# Altium PCB Remote.PcbDoc
Units mm, origin at the board's own origin, x right, y up, seen from the top; angles counter-clockwise.
Board outline 26.42 x 30.1 mm, 6 copper layers (Top Layer, Layer 3, Layer 1, Layer 2, Layer 4, Bottom Layer), stack 0.816 mm thick; 38 components, 23 nets, 120 pads, 28 vias.
Unrouted connection lines stored in the file: 17.
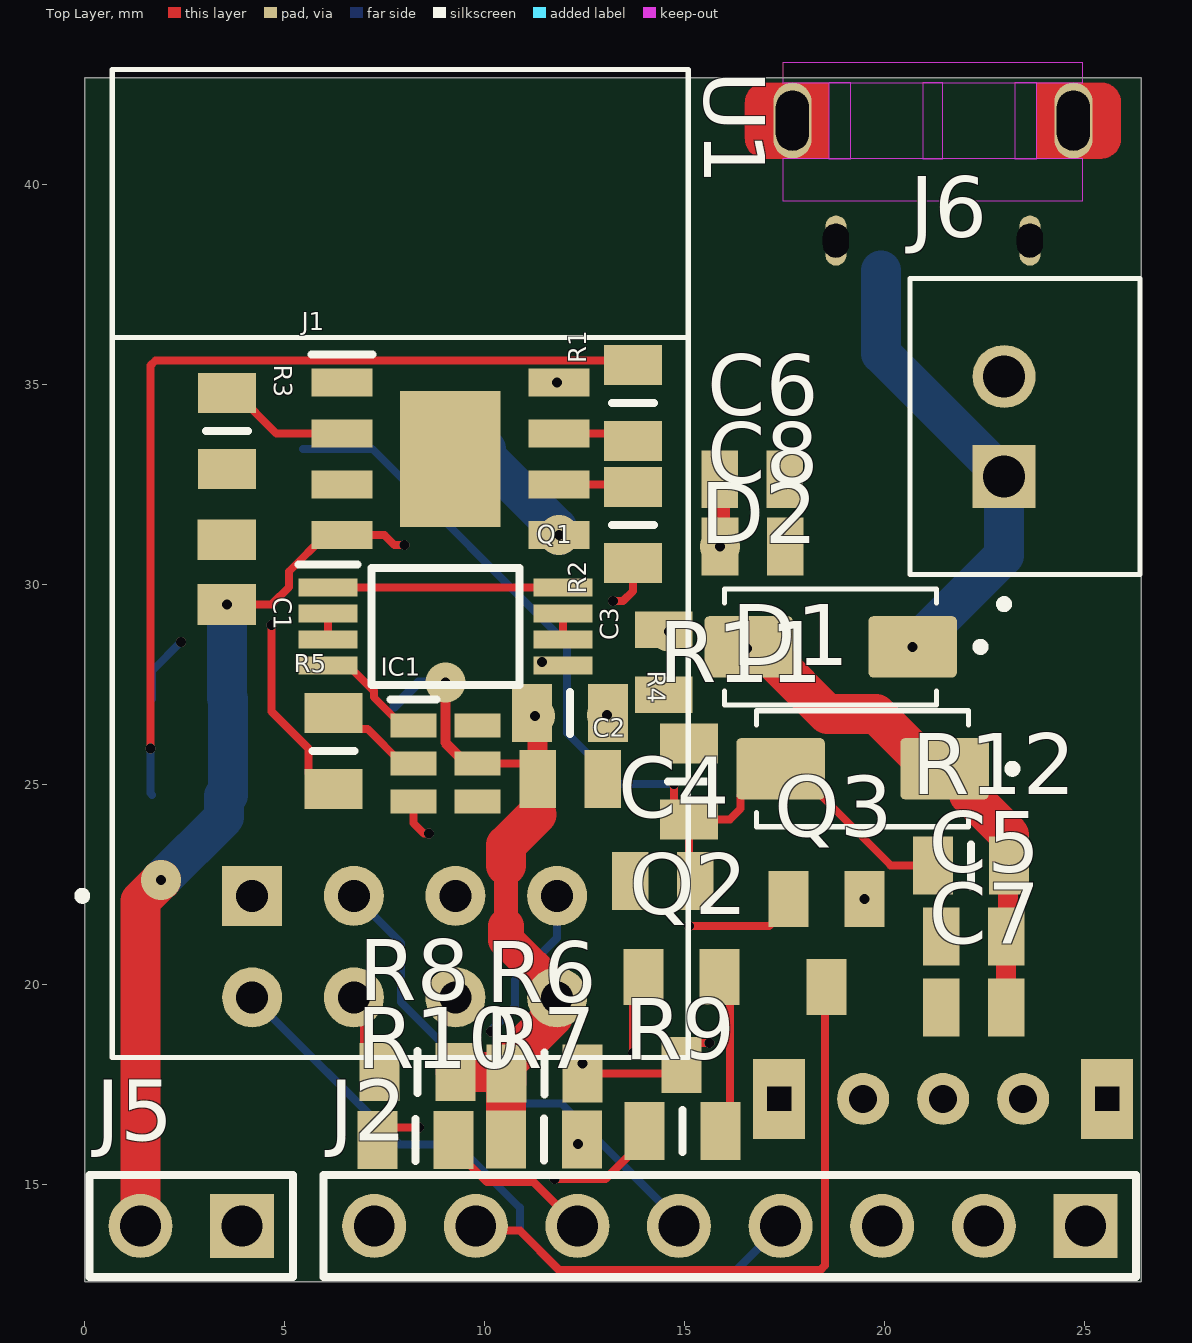
[diagram p0: Top Layer view]
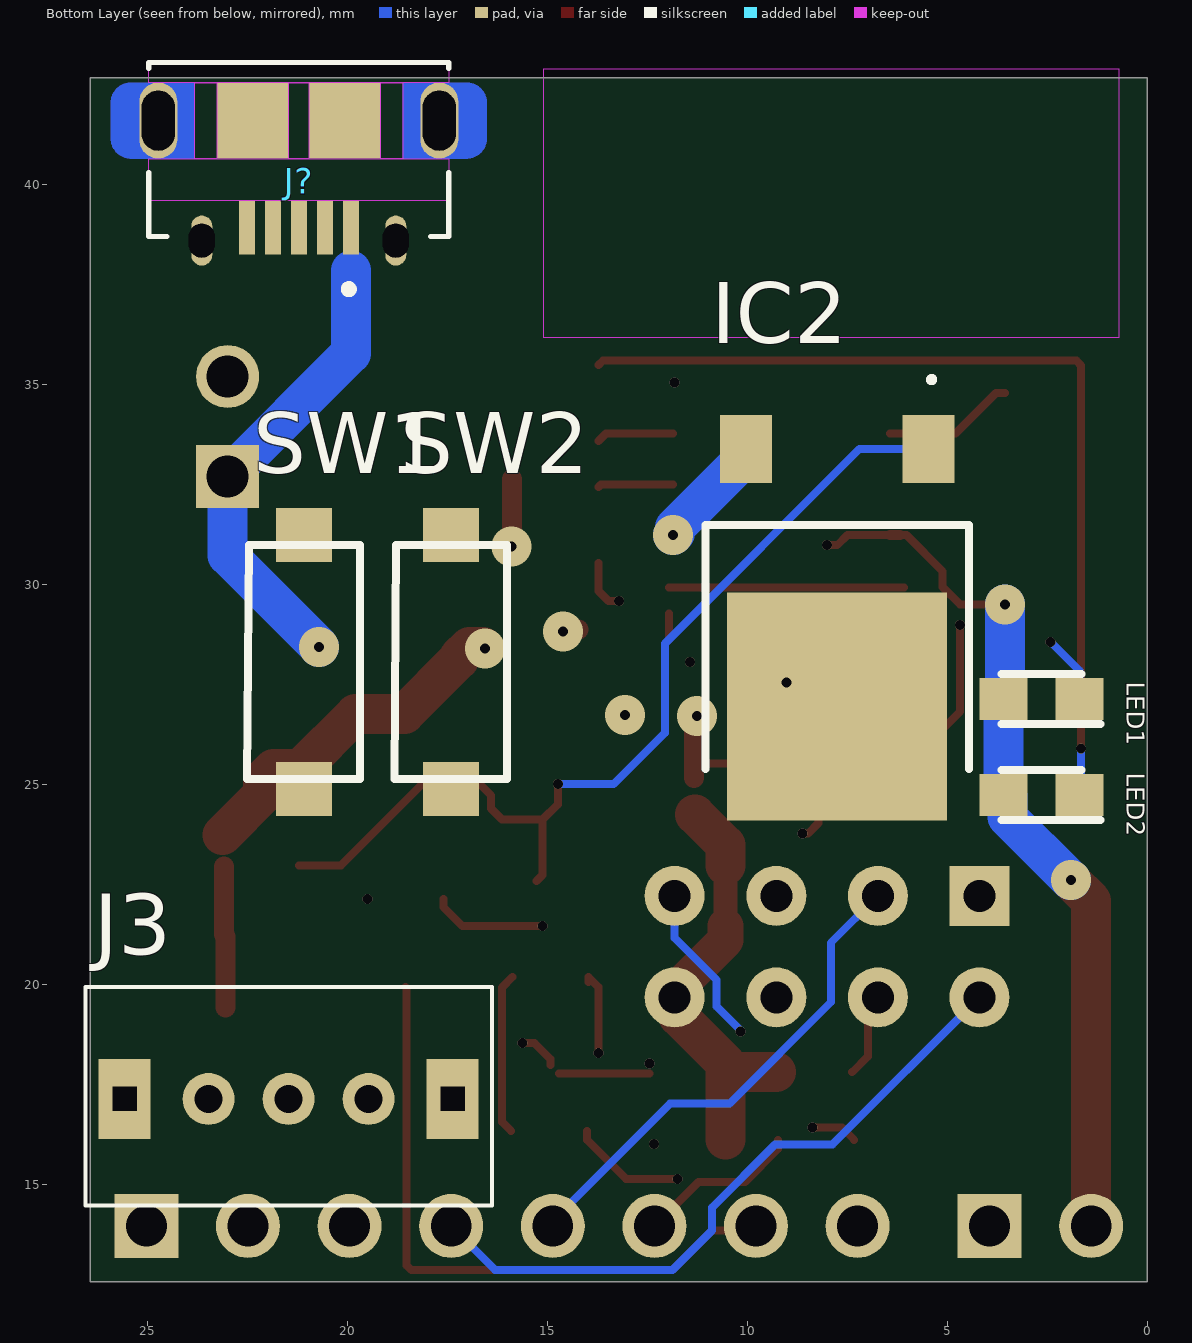
[diagram p1: Bottom Layer view, seen from below]
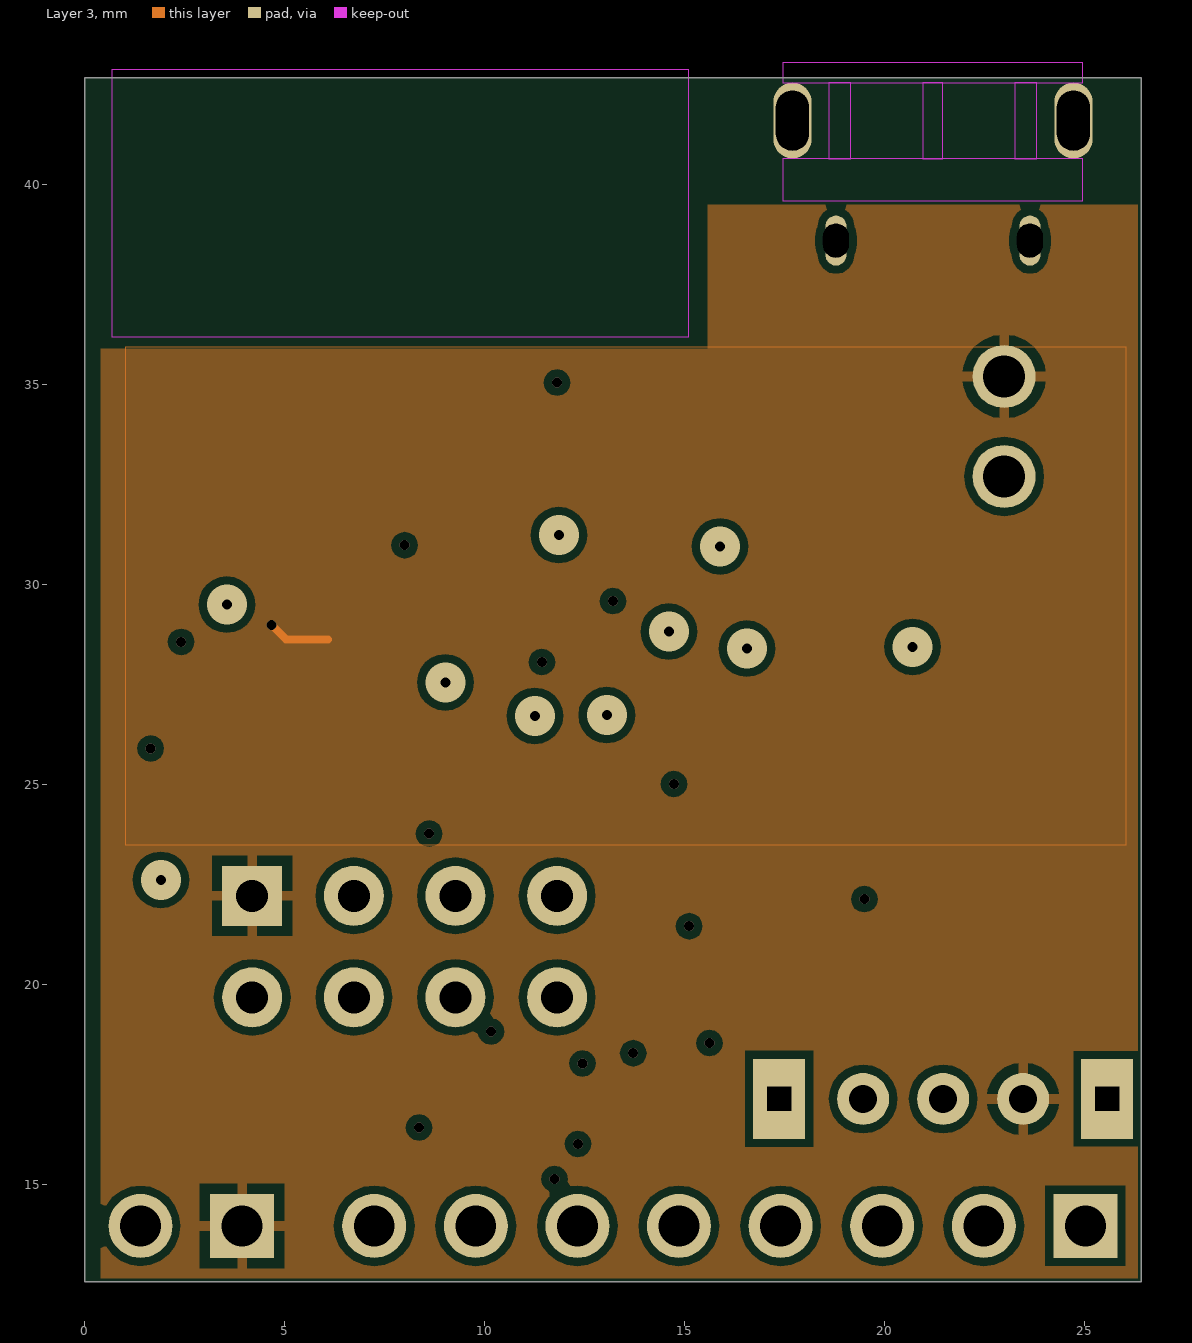
[diagram p2: Layer 3]
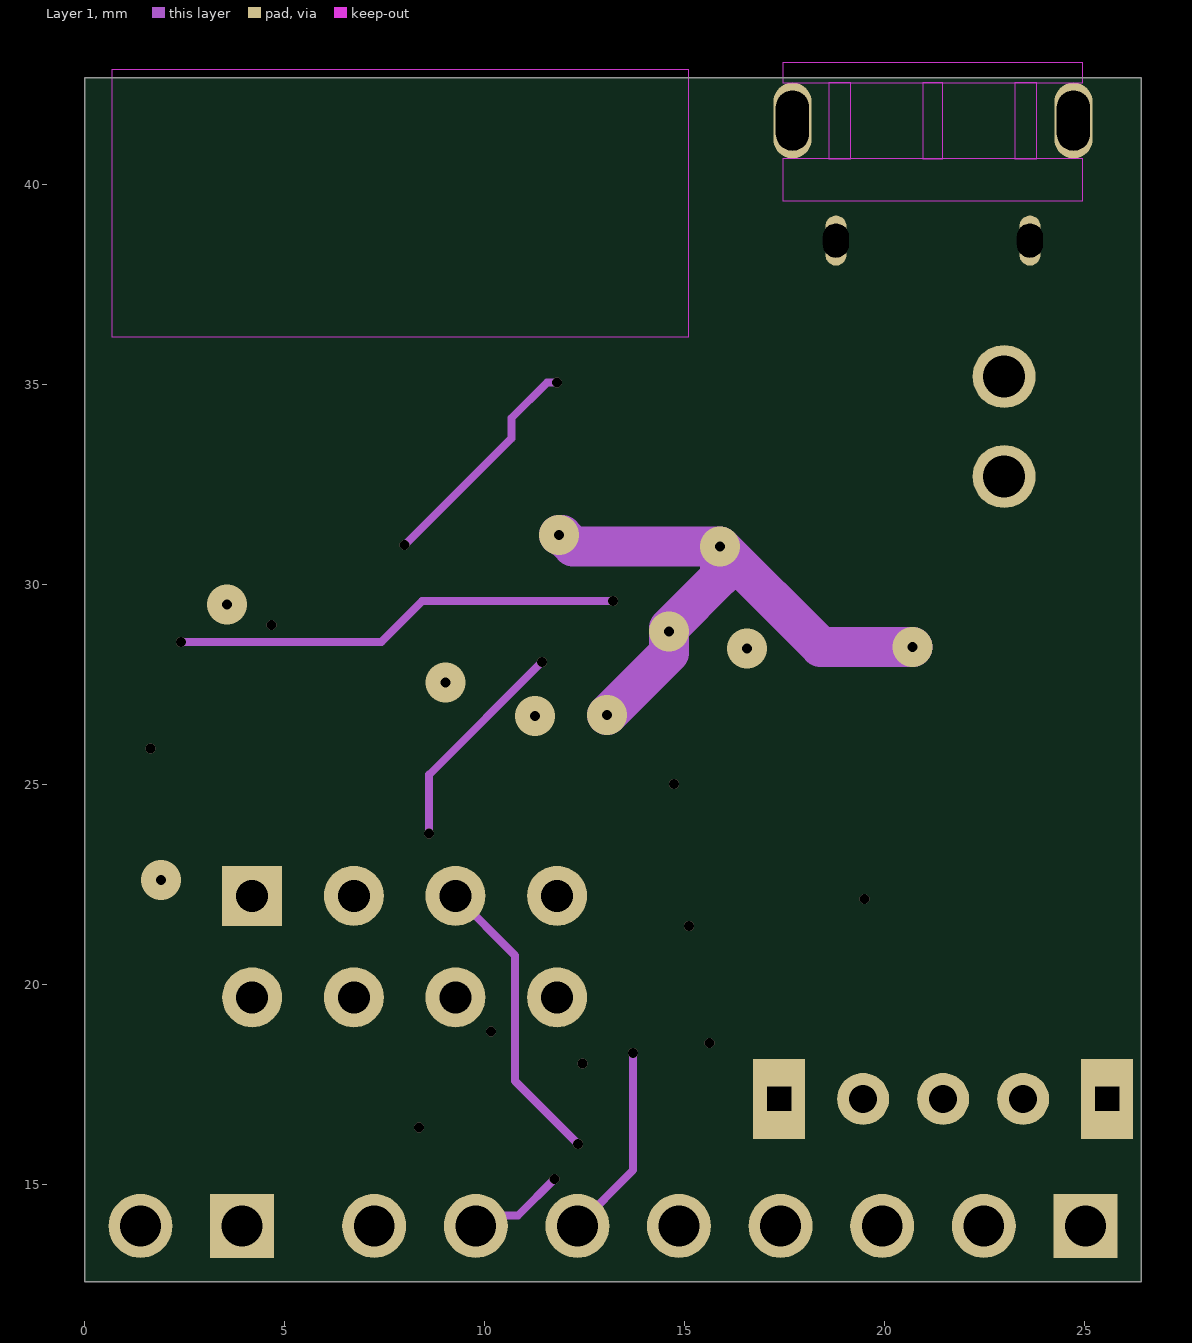
[diagram p3: Layer 1]
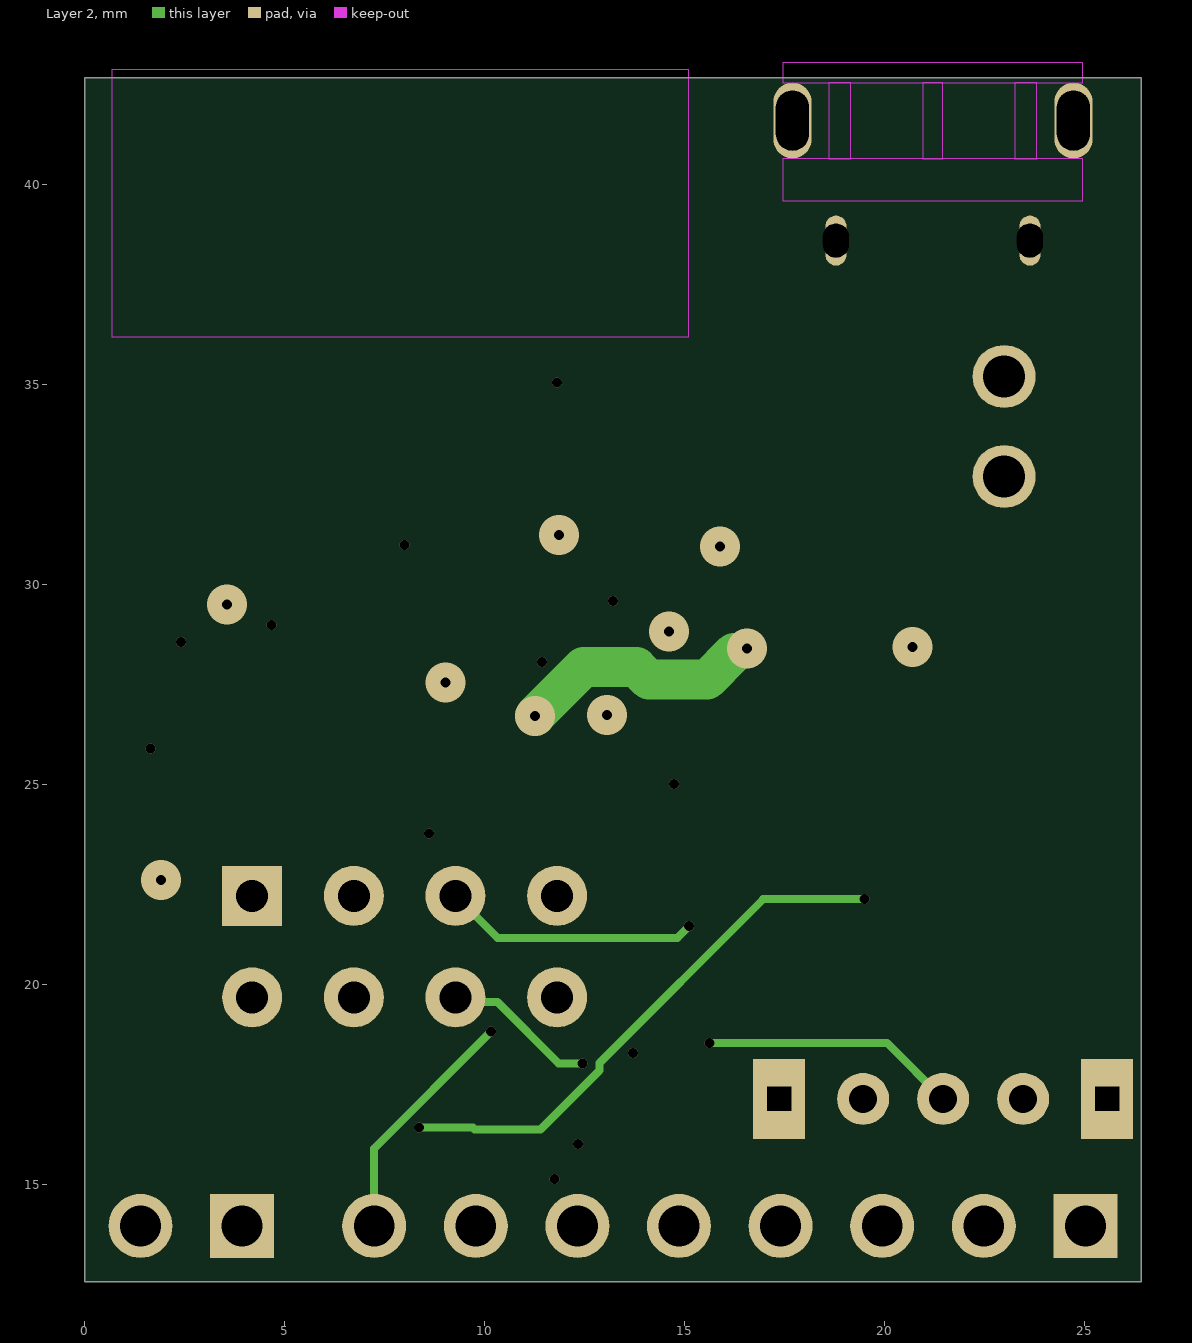
[diagram p4: Layer 2]
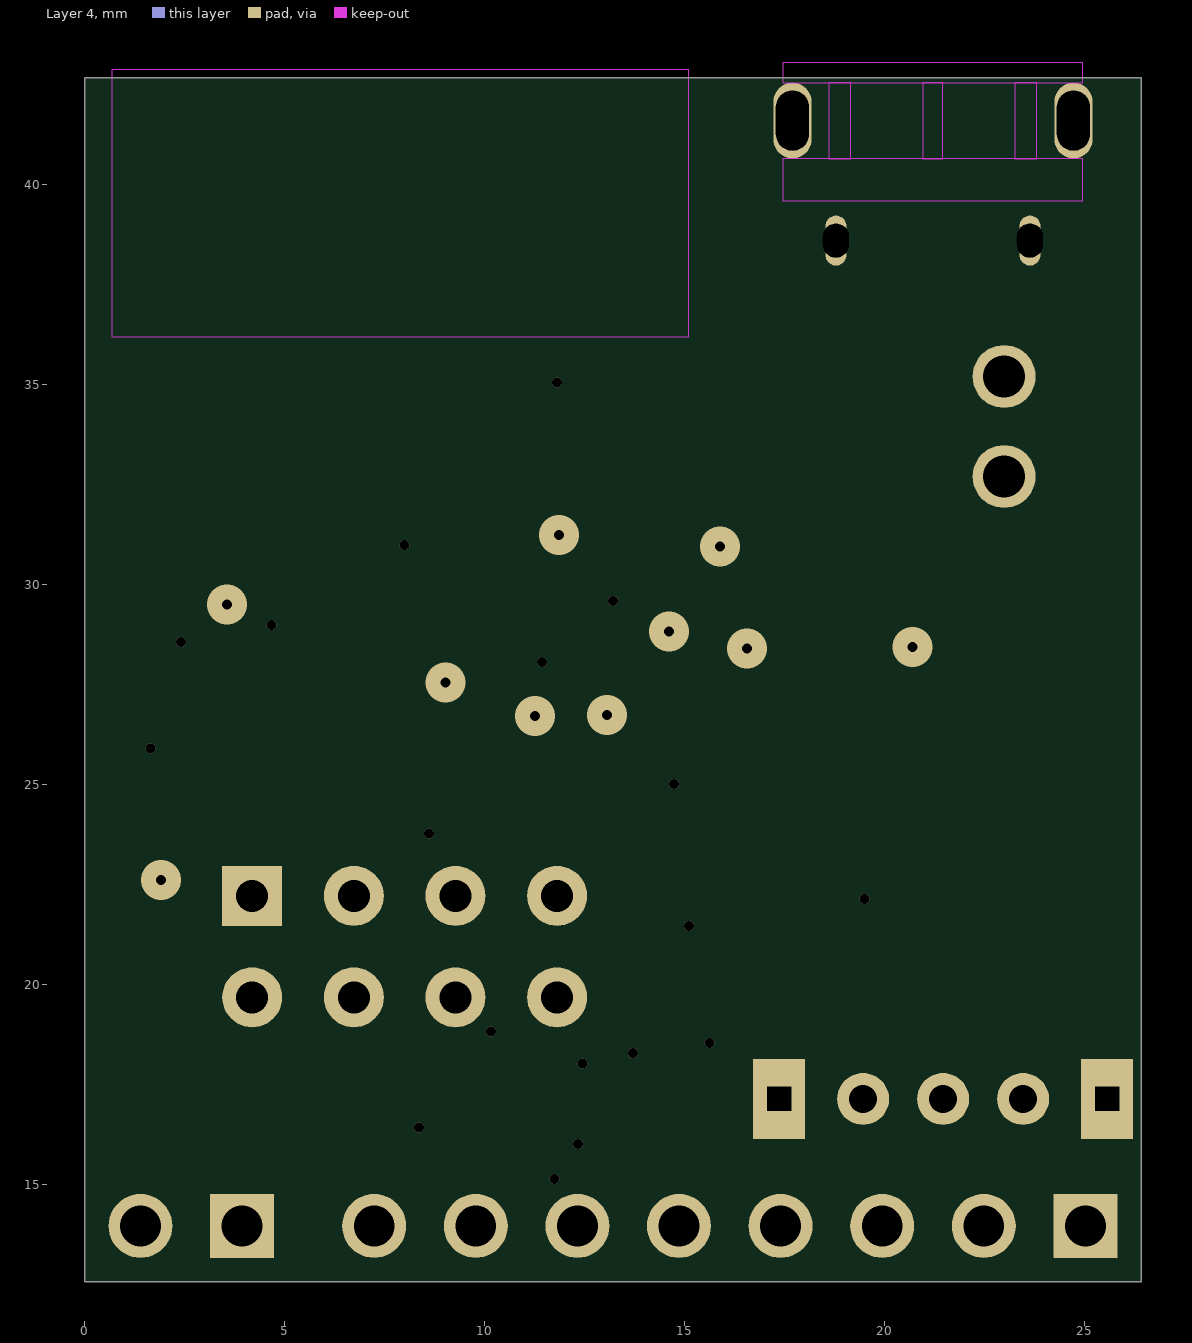
[diagram p5: Layer 4]
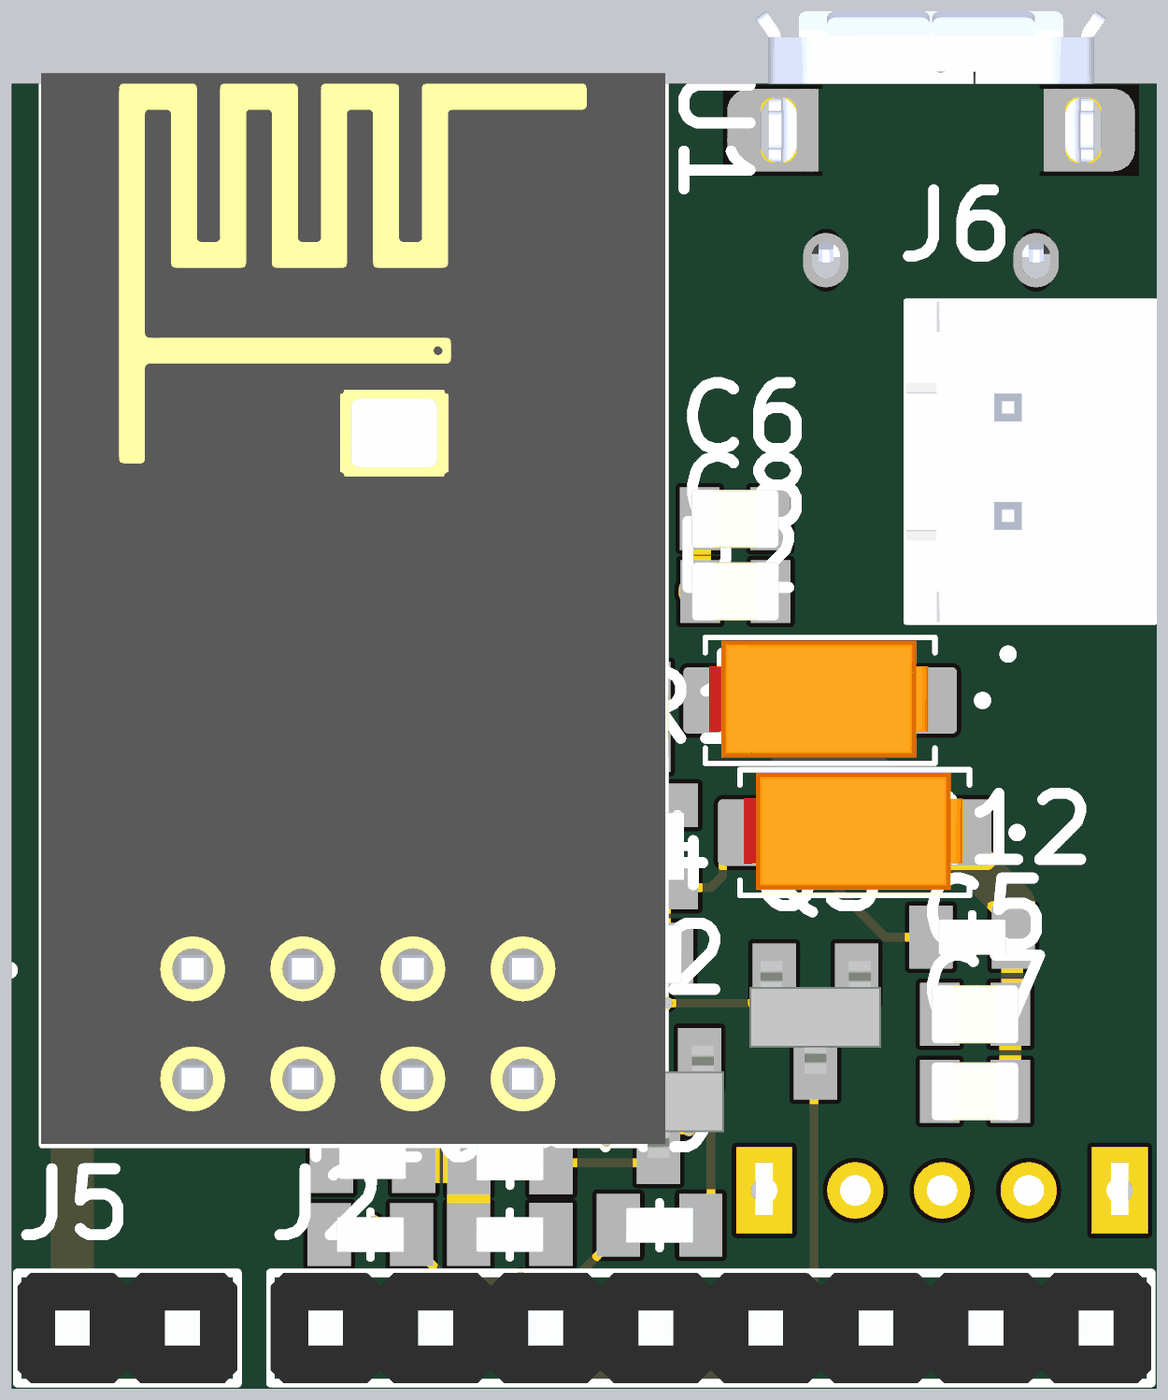
[diagram p6: 3D render of the assembled board from above, using the file's embedded part models]
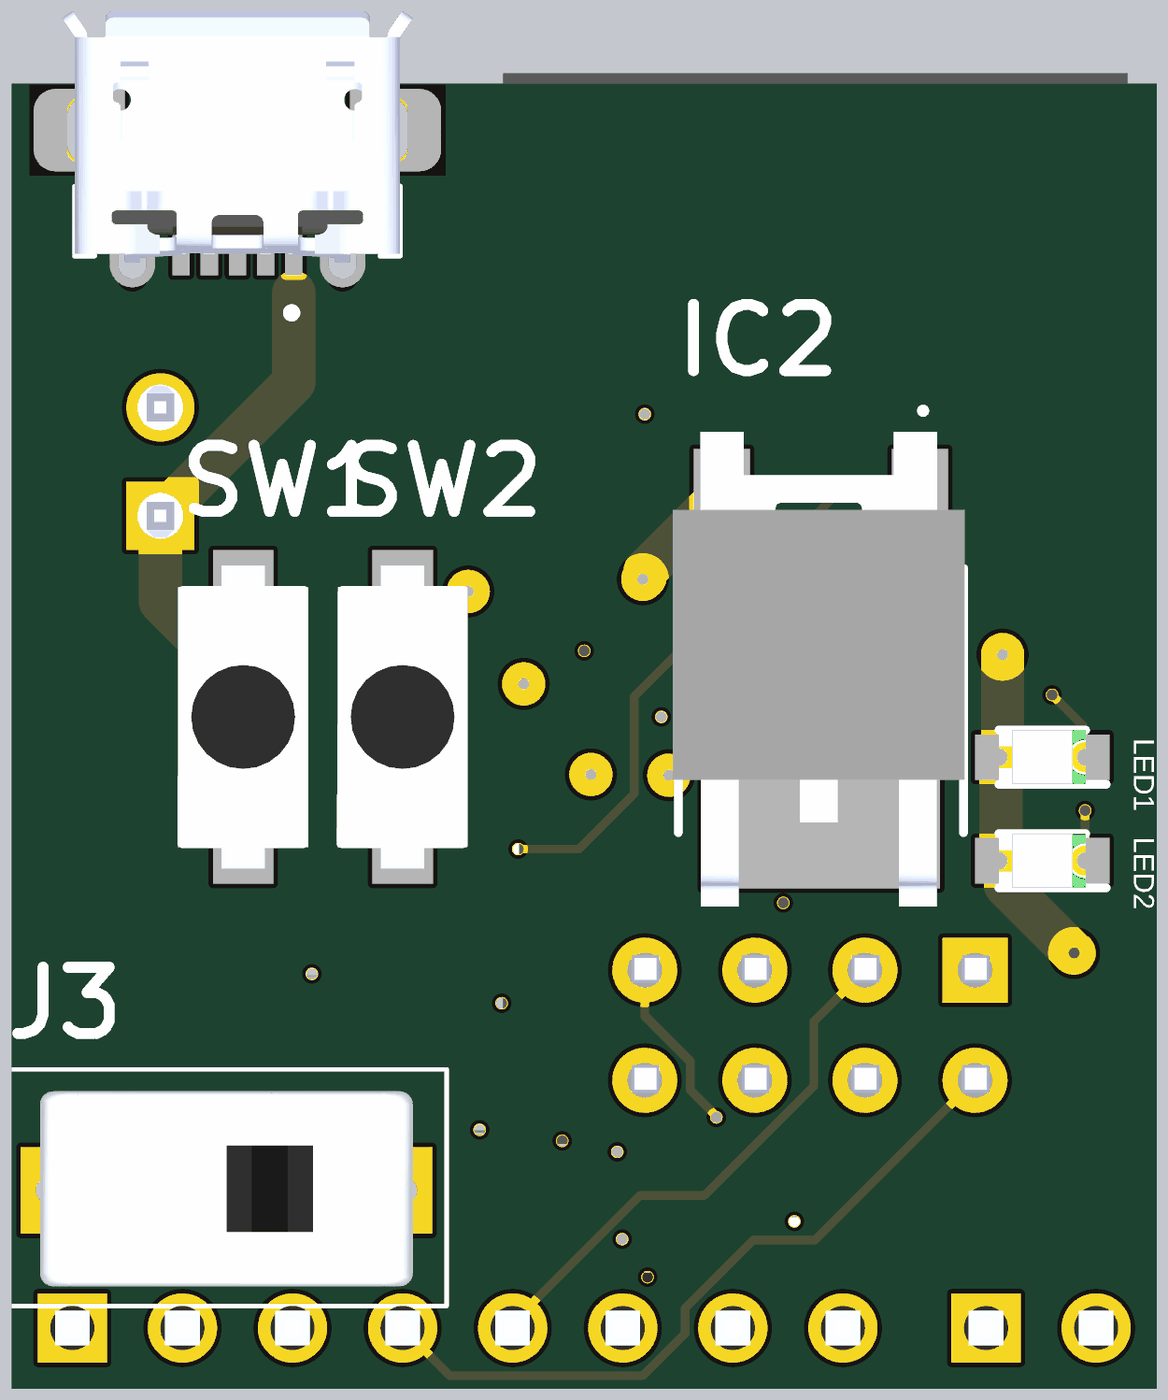
[diagram p7: 3D render of the assembled board from below, using the file's embedded part models]

## Layer stack, top to bottom
Top Solder: solder mask 0.0102, Solder Resist, Dk 3.5
Top Layer: signal copper 0.0356
Dielectric 4: prepreg 0.0711, PP-006, Dk 4.1
Layer 3: signal copper 0.035
Dielectric 2: prepreg 0.0711, PP-006, Dk 4.1
Layer 1: signal copper 0.035
Dielectric 1: dielectric 0.32, FR-4, Dk 4.8
Layer 2: signal copper 0.035
Dielectric 3: prepreg 0.0711, PP-006, Dk 4.1
Layer 4: signal copper 0.035
Dielectric 5: prepreg 0.0711, PP-006, Dk 4.1
Bottom Layer: signal copper 0.0356
Bottom Solder: solder mask 0.0102, Solder Resist, Dk 3.5

## Board outline
0,12.573 26.416,12.573 26.416,42.672 0,42.672

## Design rules (kind name [scope] priority, off if disabled: settings)
Clearance Clearance_1 [All] p1: gap=0.2 ignorepadtopadclearanceinfootprint=FALSE except(0: Arc-Hole Track-Hole SMDPad-Hole THPad-Hole Via-Hole Fill-Fill Fill-Poly Fill-Region Fill-Hole Poly-Poly Poly-Region Poly-Hole Region-Region Region-Hole Text-Hole; 0.1: Arc-Arc Arc-Track Arc-SMDPad Track-Track Track-SMDPad SMDPad-SMDPad)
Clearance [All] p2: gap=0.102 ignorepadtopadclearanceinfootprint=FALSE except(0: Arc-Hole Track-Hole SMDPad-Hole THPad-Hole Via-Hole Fill-Hole Poly-Hole Region-Hole Text-Hole; 0.127: Via-Via; 0.254: Arc-Text Track-Text SMDPad-Text THPad-Text Via-Text Fill-Text Poly-Text Region-Text Text-Text)
PolygonConnect [All] p1: connectstyle=Relief reliefconductorwidth=0.254 reliefentries=4 polygonreliefangle="90 Angle" airgapwidth=0.254
RoutingVias [All] p1: holewidth=0.711 width=1.27 viastyle="Through Hole" minholewidth=0.09 minwidth=0.127 maxholewidth=0.711 maxwidth=1.27
SolderMaskExpansion [All] p1: expansion=0.102 istentingtop=FALSE
Width [All] p1: maxlimit=1 minlimit=0.025 preferedwidth=0.127 toplayer_minwidth=0.2 toplayer_prefwidth=0.2 bottomlayer_minwidth=0.2 bottomlayer_prefwidth=0.2 minimp=50.000000 maximp=50.000000 favimp=50.000000
30 further rules are at their usual default settings.

## Classes and differential pairs
component class LM317Shamtics: C4 C5 C6 C7 C8 D1 D2 IC2 J? R11 R12
component class programmeShematics: J2 J3 Q2 Q3 R6 R7 R8 R9 R10
component class LithiumChargerShematics: C1 C2 C3 J5 J6 LED1 LED2 R1 R2 R3 R4 R5
component class RemoteShematics: IC1 J1 Q1 SW1 SW2 U1

## Components (designator, comment, footprint, x,y, rotation, side; value= is the part's Value field where it differs from the comment)
C1 "0.1u" CAPC2012X94N 3.556,30.315 r90 top locked
C2 "0.1u" CAPC2013X140N 12.141,25.146 r180 top locked
C3 "10u" CAPC2013X140N 14.478,28.067 r270 top locked
C4 "100u" CAPC2013X140N 14.453,22.594 r180 top locked
C5 "33u" CAPC2013X140N 22.225,21.209 r0 top locked
C6 "33u" CAPC2013X140N 16.688,32.639 r0 top locked
C7 "1u" CAPC2013X140N 22.225,19.431 r180 top locked
C8 "10n" CAPC2013X140N 16.698,30.961 r0 top locked
D1 "M7" DIOM505270X240 19.449,25.4 r180 top locked
D2 "M7" DIOM505270X240 18.651,28.448 r180 top locked
IC1 "DW01A-G" SOT95P190X145-6N 9.017,25.527 r0 top locked
IC2 "LM317AMDTX_NOPB" LM78M05CDT 7.747,25.4 r0 bottom locked
J1 "TP4056" SOIC127P600X175-9N 9.144,33.147 r0 top locked
J2 "Header Pins" "HEADER PIN 1x8" 16.129,13.97 r180 top locked
J3 "/ss-12d02-vg4" "Switch button" 21.463,17.145 r180 bottom locked
J5 "Header Pins" "HEADER PIN 1x2" 2.667,13.97 r180 top locked
J6 "batterie" JST_B2B-XH-A(LF)(SN) 23.512,33.957 r270 top locked
J? "ZX62D-B-5P8" HRS_ZX62D-B-5P8 21.209,41.529 r0 bottom locked
LED1 "B" LEDM2012X80N 2.641,27.139 r0 bottom locked
LED2 "R" LEDM2012X80N 2.641,24.75 r0 bottom locked
Q1 "FS8205A" SOP65P640X120-8N 9.017,28.956 r0 top locked
Q2 "BC850C,215" SOT23 14.92,19.093 r180 top locked
Q3 "BC850C,215" SOT23 18.542,21.039 r180 top locked
R1 "1k" RESC2012X65N 13.716,34.544 r270 top locked
R2 "1k" RESC2012X65N 13.716,31.496 r90 top locked
R3 "1.2k" RESC2012X65N 3.556,33.843 r90 top locked
R4 "100" RESC2012X65N 12.131,26.797 r0 top locked
R5 "1k" RESC2012X65N 6.223,25.842 r90 top locked
R6 "12k" RESC2012X65N 11.496,17.78 r180 top locked
R7 "12k" RESC2012X65N 11.491,16.129 r0 top locked
R8 "12K" RESC2012X65N 8.324,17.814 r0 top locked
R9 "12k" RESC2012X65N 14.947,16.342 r0 top locked
R10 "12k" RESC2012X65N 8.274,16.125 r180 top locked
R11 "360" RESC2012X65N 15.113,25.08 r90 top locked
R12 "240" RESC2012X65N 22.159,22.987 r0 top locked
SW1 "Switch button 6 x 3.5 x 2.5 mm" "Switch button  6 x 3.5 x 2.5 mm" 21.078,28.067 r0 bottom
SW2 "Switch button 6 x 3.5 x 2.5 mm" "Switch button  6 x 3.5 x 2.5 mm" 17.399,28.067 r0 bottom
U1 "ESP8266-01/ESP-01" XCVR_ESP8266-01/ESP-01 8.001,30.535 r0 top locked

## Footprints (in the part's own frame and the unit in brackets; to place one, negate y for a bottom-side part, rotate by r counter-clockwise, add the part's x,y. Pads: shape width x height; smd on the part's side, far side on the other; paste and mask are expansions set on the pad)
CAPC2012X94N [mm]
  rect 1.02x1.47 smd: 1(-0.81,0) 2(0.81,0)
  body extent -1,-0.63 1,0.63, height 0.94
CAPC2013X140N [mil]
  rect 36x57 smd: 1(-32,0) 2(32,0)
  body extent -40,-27 40,27, height 49
DIOM505270X240 [mm]
  rrect15% 2.21x1.53 smd: A(2.05,0) C(-2.05,0)
  silkscreen extent -3.85,-1.45 2.65,1.45, body extent -2.49,-1.38 2.56,1.32
"HEADER PIN 1x2" [mm]
  rect 1.6x1.6 hole 1.02: 1(-1.27,0)
  round 1.6 hole 1.02: 2(1.27,0)
  silkscreen extent -2.54,-1.27 2.54,1.27, body extent -2.54,-1.27 2.54,1.27, height 8.67
"HEADER PIN 1x8" [mm]
  rect 1.6x1.6 hole 1.02: 1(-8.89,0)
  round 1.6 hole 1.02: 2(-6.35,0) 3(-3.81,0) 4(-1.27,0) 5(1.27,0) 6(3.81,0) 7(6.35,0) 8(8.89,0)
  silkscreen extent -10.16,-1.27 10.16,1.27, body extent -10.16,-1.27 10.16,1.27, height 8.67
HRS_ZX62D-B-5P8 [mm]
  rect 0.4x1.35 smd mask+0.1: 1(-1.3,2.6) 2(-0.65,2.6) 3(0,2.6) 4(0.65,2.6) 5(1.3,2.6)
  oval 0.525x1.25 hole 0.65 slot 0.85 at 90 deg mask+0.1: S1(-2.425,2.925) S2(2.425,2.925)
  oval 0.95x1.9 hole 0.825 slot 1.5 at 90 deg mask+0.1: S3(-3.512,-0.075) S6(3.512,-0.075)
  rect 1.8x1.9 smd mask+0.1: S4(-1.15,-0.075) S5(1.15,-0.075)
  Top Layer region: -2.6,-1.025 -4.2,-1.025 -4.226,-1.024 -4.252,-1.022 -4.278,-1.019 -4.304,-1.014 -4.329,-1.008 -4.355,-1.001 -4.379,-0.992 -4.403,-0.982 -4.427,-0.971 -4.45,-0.958 -4.472,-0.944 -4.494,-0.93 -4.515,-0.914 -4.535,-0.897 -4.554,-0.879 -4.572,-0.86 -4.589,-0.84 -4.605,-0.819 -4.619,-0.797 -4.633,-0.775 -4.646,-0.752 -4.657,-0.728 -4.667,-0.704 -4.676,-0.68 -4.683,-0.654 -4.689,-0.629 -4.694,-0.603 -4.697,-0.577 -4.699,-0.551 -4.7,-0.525 -4.7,-0.075 -3.925,-0.075 -3.925,-0.55 -3.925,-0.564 -3.923,-0.579 -3.922,-0.593 -3.919,-0.607 -3.916,-0.621 -3.912,-0.635 -3.907,-0.649 -3.901,-0.662 -3.895,-0.675 -3.888,-0.688 -3.881,-0.7 -3.872,-0.712 -3.864,-0.723 -3.854,-0.734 -3.844,-0.744 -3.834,-0.754 -3.823,-0.764 -3.812,-0.772 -3.8,-0.781 -3.787,-0.788 -3.775,-0.795 -3.762,-0.801 -3.749,-0.807 -3.735,-0.812 -3.721,-0.816 -3.707,-0.819 -3.693,-0.822 -3.679,-0.823 -3.664,-0.825 -3.384,-0.825 -3.369,-0.823 -3.353,-0.821 -3.338,-0.818 -3.322,-0.815 -3.307,-0.81 -3.292,-0.805 -3.278,-0.799 -3.264,-0.792 -3.25,-0.785 -3.237,-0.777 -3.224,-0.768 -3.211,-0.758 -3.199,-0.748 -3.188,-0.737 -3.177,-0.726 -3.167,-0.714 -3.157,-0.701 -3.148,-0.688 -3.14,-0.675 -3.133,-0.661 -3.126,-0.647 -3.12,-0.633 -3.115,-0.618 -3.11,-0.603 -3.107,-0.587 -3.104,-0.572 -3.102,-0.556 -3.1,-0.541 -3.1,-0.525 -3.1,-0.075 -2.6,-0.075
  Top Layer region: 4.226,0.874 4.252,0.872 4.278,0.869 4.304,0.864 4.329,0.858 4.355,0.851 4.379,0.842 4.403,0.832 4.427,0.821 4.45,0.808 4.472,0.794 4.494,0.78 4.515,0.764 4.535,0.747 4.554,0.729 4.572,0.71 4.589,0.69 4.605,0.669 4.619,0.647 4.633,0.625 4.646,0.602 4.657,0.578 4.667,0.554 4.676,0.53 4.683,0.504 4.689,0.479 4.694,0.453 4.697,0.427 4.699,0.401 4.7,0.375 4.7,-0.075 3.925,-0.075 3.925,0.4 3.925,0.414 3.923,0.429 3.922,0.443 3.919,0.457 3.916,0.471 3.912,0.485 3.907,0.499 3.901,0.512 3.895,0.525 3.888,0.538 3.881,0.55 3.872,0.562 3.864,0.573 3.854,0.584 3.844,0.594 3.834,0.604 3.823,0.614 3.812,0.622 3.8,0.631 3.787,0.638 3.775,0.645 3.762,0.651 3.749,0.657 3.735,0.662 3.721,0.666 3.707,0.669 3.693,0.672 3.679,0.673 3.664,0.675 3.384,0.675 3.369,0.673 3.353,0.671 3.338,0.668 3.322,0.665 3.307,0.66 3.292,0.655 3.278,0.649 3.264,0.642 3.25,0.635 3.237,0.627 3.224,0.618 3.211,0.608 3.199,0.598 3.188,0.587 3.177,0.576 3.167,0.564 3.157,0.551 3.148,0.538 3.14,0.525 3.133,0.511 3.126,0.497 3.12,0.483 3.115,0.468 3.11,0.453 3.107,0.437 3.104,0.422 3.102,0.406 3.1,0.391 3.1,0.375 3.1,-0.075 2.6,-0.075 2.6,0.875 4.2,0.875
  Top Layer region: 4.7,-0.525 4.699,-0.551 4.697,-0.577 4.694,-0.603 4.689,-0.629 4.683,-0.654 4.676,-0.68 4.667,-0.704 4.657,-0.728 4.646,-0.752 4.633,-0.775 4.619,-0.797 4.605,-0.819 4.589,-0.84 4.572,-0.86 4.554,-0.879 4.535,-0.897 4.515,-0.914 4.494,-0.93 4.472,-0.944 4.45,-0.958 4.427,-0.971 4.403,-0.982 4.379,-0.992 4.355,-1.001 4.329,-1.008 4.304,-1.014 4.278,-1.019 4.252,-1.022 4.226,-1.024 4.2,-1.025 2.6,-1.025 2.6,-0.075 3.1,-0.075 3.1,-0.525 3.1,-0.541 3.102,-0.556 3.104,-0.572 3.107,-0.587 3.11,-0.603 3.115,-0.618 3.12,-0.633 3.126,-0.647 3.133,-0.661 3.14,-0.675 3.148,-0.688 3.157,-0.701 3.167,-0.714 3.177,-0.726 3.188,-0.737 3.199,-0.748 3.211,-0.758 3.224,-0.768 3.237,-0.777 3.25,-0.785 3.264,-0.792 3.278,-0.799 3.292,-0.805 3.307,-0.81 3.322,-0.815 3.338,-0.818 3.353,-0.821 3.369,-0.823 3.384,-0.825 3.641,-0.825 3.656,-0.823 3.672,-0.821 3.687,-0.818 3.703,-0.815 3.718,-0.81 3.733,-0.805 3.747,-0.799 3.761,-0.792 3.775,-0.785 3.788,-0.777 3.801,-0.768 3.814,-0.758 3.826,-0.748 3.837,-0.737 3.848,-0.726 3.858,-0.714 3.868,-0.701 3.877,-0.688 3.885,-0.675 3.892,-0.661 3.899,-0.647 3.905,-0.633 3.91,-0.618 3.915,-0.603 3.918,-0.587 3.921,-0.572 3.923,-0.556 3.925,-0.541 3.925,-0.525 3.925,-0.075 4.7,-0.075
  Top Layer region: -2.6,-0.075 -3.1,-0.075 -3.1,0.375 -3.1,0.391 -3.102,0.406 -3.104,0.422 -3.107,0.437 -3.11,0.453 -3.115,0.468 -3.12,0.483 -3.126,0.497 -3.133,0.511 -3.14,0.525 -3.148,0.538 -3.157,0.551 -3.167,0.564 -3.177,0.576 -3.188,0.587 -3.199,0.598 -3.211,0.608 -3.224,0.618 -3.237,0.627 -3.25,0.635 -3.264,0.642 -3.278,0.649 -3.292,0.655 -3.307,0.66 -3.322,0.665 -3.338,0.668 -3.353,0.671 -3.369,0.673 -3.384,0.675 -3.641,0.675 -3.656,0.673 -3.672,0.671 -3.687,0.668 -3.703,0.665 -3.718,0.66 -3.733,0.655 -3.747,0.649 -3.761,0.642 -3.775,0.635 -3.788,0.627 -3.801,0.618 -3.814,0.608 -3.826,0.598 -3.837,0.587 -3.848,0.576 -3.858,0.564 -3.868,0.551 -3.877,0.538 -3.885,0.525 -3.892,0.511 -3.899,0.497 -3.905,0.483 -3.91,0.468 -3.915,0.453 -3.918,0.437 -3.921,0.422 -3.923,0.406 -3.925,0.391 -3.925,0.375 -3.925,-0.075 -4.7,-0.075 -4.7,0.375 -4.699,0.401 -4.697,0.427 -4.694,0.453 -4.689,0.479 -4.683,0.504 -4.676,0.53 -4.667,0.554 -4.657,0.578 -4.646,0.602 -4.633,0.625 -4.619,0.647 -4.605,0.669 -4.589,0.69 -4.572,0.71 -4.554,0.729 -4.535,0.747 -4.515,0.764 -4.494,0.78 -4.472,0.794 -4.45,0.808 -4.427,0.821 -4.403,0.832 -4.379,0.842 -4.355,0.851 -4.329,0.858 -4.304,0.864 -4.278,0.869 -4.252,0.872 -4.226,0.874 -4.2,0.875 -2.6,0.875
  Bottom Layer region: 4.226,0.874 4.252,0.872 4.278,0.869 4.304,0.864 4.329,0.858 4.355,0.851 4.379,0.842 4.403,0.832 4.427,0.821 4.45,0.808 4.472,0.794 4.494,0.78 4.515,0.764 4.535,0.747 4.554,0.729 4.572,0.71 4.589,0.69 4.605,0.669 4.619,0.647 4.633,0.625 4.646,0.602 4.657,0.578 4.667,0.554 4.676,0.53 4.683,0.504 4.689,0.479 4.694,0.453 4.697,0.427 4.699,0.401 4.7,0.375 4.7,-0.075 3.925,-0.075 3.925,0.4 3.925,0.414 3.923,0.429 3.922,0.443 3.919,0.457 3.916,0.471 3.912,0.485 3.907,0.499 3.901,0.512 3.895,0.525 3.888,0.538 3.881,0.55 3.872,0.562 3.864,0.573 3.854,0.584 3.844,0.594 3.834,0.604 3.823,0.614 3.812,0.622 3.8,0.631 3.787,0.638 3.775,0.645 3.762,0.651 3.749,0.657 3.735,0.662 3.721,0.666 3.707,0.669 3.693,0.672 3.679,0.673 3.664,0.675 3.384,0.675 3.369,0.673 3.353,0.671 3.338,0.668 3.322,0.665 3.307,0.66 3.292,0.655 3.278,0.649 3.264,0.642 3.25,0.635 3.237,0.627 3.224,0.618 3.211,0.608 3.199,0.598 3.188,0.587 3.177,0.576 3.167,0.564 3.157,0.551 3.148,0.538 3.14,0.525 3.133,0.511 3.126,0.497 3.12,0.483 3.115,0.468 3.11,0.453 3.107,0.437 3.104,0.422 3.102,0.406 3.1,0.391 3.1,0.375 3.1,-0.075 2.6,-0.075 2.6,0.875 4.2,0.875
  Bottom Layer region: -2.6,-1.025 -4.2,-1.025 -4.226,-1.024 -4.252,-1.022 -4.278,-1.019 -4.304,-1.014 -4.329,-1.008 -4.355,-1.001 -4.379,-0.992 -4.403,-0.982 -4.427,-0.971 -4.45,-0.958 -4.472,-0.944 -4.494,-0.93 -4.515,-0.914 -4.535,-0.897 -4.554,-0.879 -4.572,-0.86 -4.589,-0.84 -4.605,-0.819 -4.619,-0.797 -4.633,-0.775 -4.646,-0.752 -4.657,-0.728 -4.667,-0.704 -4.676,-0.68 -4.683,-0.654 -4.689,-0.629 -4.694,-0.603 -4.697,-0.577 -4.699,-0.551 -4.7,-0.525 -4.7,-0.075 -3.925,-0.075 -3.925,-0.55 -3.925,-0.564 -3.923,-0.579 -3.922,-0.593 -3.919,-0.607 -3.916,-0.621 -3.912,-0.635 -3.907,-0.649 -3.901,-0.662 -3.895,-0.675 -3.888,-0.688 -3.881,-0.7 -3.872,-0.712 -3.864,-0.723 -3.854,-0.734 -3.844,-0.744 -3.834,-0.754 -3.823,-0.764 -3.812,-0.772 -3.8,-0.781 -3.787,-0.788 -3.775,-0.795 -3.762,-0.801 -3.749,-0.807 -3.735,-0.812 -3.721,-0.816 -3.707,-0.819 -3.693,-0.822 -3.679,-0.823 -3.664,-0.825 -3.384,-0.825 -3.369,-0.823 -3.353,-0.821 -3.338,-0.818 -3.322,-0.815 -3.307,-0.81 -3.292,-0.805 -3.278,-0.799 -3.264,-0.792 -3.25,-0.785 -3.237,-0.777 -3.224,-0.768 -3.211,-0.758 -3.199,-0.748 -3.188,-0.737 -3.177,-0.726 -3.167,-0.714 -3.157,-0.701 -3.148,-0.688 -3.14,-0.675 -3.133,-0.661 -3.126,-0.647 -3.12,-0.633 -3.115,-0.618 -3.11,-0.603 -3.107,-0.587 -3.104,-0.572 -3.102,-0.556 -3.1,-0.541 -3.1,-0.525 -3.1,-0.075 -2.6,-0.075
  Bottom Layer region: 4.7,-0.525 4.699,-0.551 4.697,-0.577 4.694,-0.603 4.689,-0.629 4.683,-0.654 4.676,-0.68 4.667,-0.704 4.657,-0.728 4.646,-0.752 4.633,-0.775 4.619,-0.797 4.605,-0.819 4.589,-0.84 4.572,-0.86 4.554,-0.879 4.535,-0.897 4.515,-0.914 4.494,-0.93 4.472,-0.944 4.45,-0.958 4.427,-0.971 4.403,-0.982 4.379,-0.992 4.355,-1.001 4.329,-1.008 4.304,-1.014 4.278,-1.019 4.252,-1.022 4.226,-1.024 4.2,-1.025 2.6,-1.025 2.6,-0.075 3.1,-0.075 3.1,-0.525 3.1,-0.541 3.102,-0.556 3.104,-0.572 3.107,-0.587 3.11,-0.603 3.115,-0.618 3.12,-0.633 3.126,-0.647 3.133,-0.661 3.14,-0.675 3.148,-0.688 3.157,-0.701 3.167,-0.714 3.177,-0.726 3.188,-0.737 3.199,-0.748 3.211,-0.758 3.224,-0.768 3.237,-0.777 3.25,-0.785 3.264,-0.792 3.278,-0.799 3.292,-0.805 3.307,-0.81 3.322,-0.815 3.338,-0.818 3.353,-0.821 3.369,-0.823 3.384,-0.825 3.641,-0.825 3.656,-0.823 3.672,-0.821 3.687,-0.818 3.703,-0.815 3.718,-0.81 3.733,-0.805 3.747,-0.799 3.761,-0.792 3.775,-0.785 3.788,-0.777 3.801,-0.768 3.814,-0.758 3.826,-0.748 3.837,-0.737 3.848,-0.726 3.858,-0.714 3.868,-0.701 3.877,-0.688 3.885,-0.675 3.892,-0.661 3.899,-0.647 3.905,-0.633 3.91,-0.618 3.915,-0.603 3.918,-0.587 3.921,-0.572 3.923,-0.556 3.925,-0.541 3.925,-0.525 3.925,-0.075 4.7,-0.075
  Bottom Layer region: -2.6,-0.075 -3.1,-0.075 -3.1,0.375 -3.1,0.391 -3.102,0.406 -3.104,0.422 -3.107,0.437 -3.11,0.453 -3.115,0.468 -3.12,0.483 -3.126,0.497 -3.133,0.511 -3.14,0.525 -3.148,0.538 -3.157,0.551 -3.167,0.564 -3.177,0.576 -3.188,0.587 -3.199,0.598 -3.211,0.608 -3.224,0.618 -3.237,0.627 -3.25,0.635 -3.264,0.642 -3.278,0.649 -3.292,0.655 -3.307,0.66 -3.322,0.665 -3.338,0.668 -3.353,0.671 -3.369,0.673 -3.384,0.675 -3.641,0.675 -3.656,0.673 -3.672,0.671 -3.687,0.668 -3.703,0.665 -3.718,0.66 -3.733,0.655 -3.747,0.649 -3.761,0.642 -3.775,0.635 -3.788,0.627 -3.801,0.618 -3.814,0.608 -3.826,0.598 -3.837,0.587 -3.848,0.576 -3.858,0.564 -3.868,0.551 -3.877,0.538 -3.885,0.525 -3.892,0.511 -3.899,0.497 -3.905,0.483 -3.91,0.468 -3.915,0.453 -3.918,0.437 -3.921,0.422 -3.923,0.406 -3.925,0.391 -3.925,0.375 -3.925,-0.075 -4.7,-0.075 -4.7,0.375 -4.699,0.401 -4.697,0.427 -4.694,0.453 -4.689,0.479 -4.683,0.504 -4.676,0.53 -4.667,0.554 -4.657,0.578 -4.646,0.602 -4.633,0.625 -4.619,0.647 -4.605,0.669 -4.589,0.69 -4.572,0.71 -4.554,0.729 -4.535,0.747 -4.515,0.764 -4.494,0.78 -4.472,0.794 -4.45,0.808 -4.427,0.821 -4.403,0.832 -4.379,0.842 -4.355,0.851 -4.329,0.858 -4.304,0.864 -4.278,0.869 -4.252,0.872 -4.226,0.874 -4.2,0.875 -2.6,0.875
  Keep-Out Layer region: 3.75,-1.525 -3.75,-1.525 -3.75,-1.025 3.75,-1.025
  Keep-Out Layer region: 2.6,-1.025 2.05,-1.025 2.05,0.875 2.6,0.875
  Keep-Out Layer region: 0.25,-1.025 -0.25,-1.025 -0.25,0.875 0.25,0.875
  Keep-Out Layer region: -2.05,-1.025 -2.6,-1.025 -2.6,0.875 -2.05,0.875
  Keep-Out Layer region: 3.75,0.875 -3.75,0.875 -3.75,1.925 3.75,1.925
  Keep-Out Layer region: 2.6,-1.025 2.05,-1.025 2.05,0.875 2.6,0.875
  Keep-Out Layer region: 0.25,-1.025 -0.25,-1.025 -0.25,0.875 0.25,0.875
  Keep-Out Layer region: -2.05,-1.025 -2.6,-1.025 -2.6,0.875 -2.05,0.875
  silkscreen extent -3.75,-1.53 3.75,4.24, body extent -4.05,-2.82 4.05,2.98, height 2.75
JST_B2B-XH-A(LF)(SN) [mm]
  rect 1.575x1.575 / inner round 1.575 / far side rect 1.575x1.575 hole 1.05: 1(1.25,-0.525)
  round 1.575 hole 1.05: 2(-1.25,-0.525)
  silkscreen extent -3.7,-2.88 4.54,2.88, body extent -3.7,-2.88 3.7,2.88, height 7
LEDM2012X80N [mm]
  rect 1.2x1.05 smd: 1(-0.95,0) 2(0.95,0)
  silkscreen extent -1.48,-0.63 1,0.63, body extent -1,-0.62 1,0.62, height 0.7
LM78M05CDT [mm]
  rect 1.3x1.7 smd: 1(-2.285,-8) 2(2.285,-8)
  rect 5.5x5.7 smd: 3(0,-1.56)
  silkscreen extent -3.29,-9.77 3.29,0, body extent -3.32,-9.25 3.42,1.71, height 2.46
RESC2012X65N [mm]
  rect 1x1.45 smd: 1(-0.95,0) 2(0.95,0)
  silkscreen extent 0,-0.53 0,0.53, body extent -0.77,-0.4 0.77,0.4, height 0.46
SOIC127P600X175-9N [mm]
  rect 1.525x0.7 smd: 1(-2.712,1.905) 2(-2.712,0.635) 3(-2.712,-0.635) 4(-2.712,-1.905) 5(2.712,-1.905) 6(2.712,-0.635) 7(2.712,0.635) 8(2.712,1.905)
  rect 2.513x3.402 smd: 9(0,0)
  silkscreen extent -3.47,2.61 -1.95,2.61, body extent -3,-2.45 3,2.45, height 1.75
SOP65P640X120-8N [mm]
  rect 1.475x0.45 smd: 1(-2.938,0.975) 2(-2.938,0.325) 3(-2.938,-0.325) 4(-2.938,-0.975) 5(2.938,-0.975) 6(2.938,-0.325) 7(2.938,0.325) 8(2.938,0.975)
  silkscreen extent -3.67,-1.47 1.85,1.55, body extent -3.2,-1.47 3.2,1.47, height 1.2
SOT23 [mm]
  rect 1x1.4 smd: 1(-0.95,-1.1) 2(0.95,-1.1) 3(0,1.1)
  body extent -1.52,-1.4 1.52,1.2, height 1.2
SOT95P190X145-6N [mm]
  rect 1.15x0.6 smd: 1(-0.8,0.95) 2(-0.8,0) 3(-0.8,-0.95) 4(0.8,-0.95) 5(0.8,0) 6(0.8,0.95)
  silkscreen extent -1.38,1.6 -0.23,1.6, body extent -1.5,-1.53 1.5,1.53, height 1.45
"Switch button" [mm] "SS12D02-VG4"
  round 1.3 hole 0.7: 1(-2,0) 2(0,0) 3(2,0)
  rect 1.3x2 hole 0.6 square: ""(-4.1,0) ""(4.1,0)
  silkscreen extent -5.08,-2.67 5.08,2.79, body extent -4.3,-2.21 4.3,2.29, height 8.8
"Switch button  6 x 3.5 x 2.5 mm" [mm] "Interrupteur tactile Wurth Elektronik CMS, SPST, 6 x 3.5 x 2.5mm"
  rect 1.4x1.35 smd: 1(0,-3.175) 2(0,3.175)
  silkscreen extent -1.4,-2.92 1.42,2.92, body extent -1.5,-3.5 1.5,3.5, height 2.6
XCVR_ESP8266-01/ESP-01 [mm]
  rect 1.5x1.5 hole 0.8: 1(-3.81,-8.31)
  round 1.5 hole 0.8: 2(-1.27,-8.31) 3(1.27,-8.31) 4(3.81,-8.31) 5(-3.81,-10.85) 6(-1.27,-10.85) 7(1.27,-10.85) 8(3.81,-10.85)
  Keep-Out Layer region: 7.09,5.65 -7.31,5.65 -7.31,12.35 7.09,12.35
  silkscreen extent -8.16,-12.35 7.09,12.35, body extent -7.33,-12.32 7.07,12.38, height 6.5

## Part data
C1: library part 08055A331FAT2A, "Capacitor", Manufacturer_Name="Kyocera AVX", Mouser Part Number=581-08055A331FAT2A, Arrow Part Number=08055A331FAT2A, Arrow Price/Stock=https://www.arrow.com/en/products/08055a331fat2a/avx, Datasheet Link=https://componentsearchengine.com/Datasheets/1/06031A100FAT2A.pdf, Height=0.94mm, Manufacturer_Part_Number=08055A331FAT2A, Mouser Price/Stock=https://www.mouser.com/Search/Refine.aspx?Keyword=581-08055A331FAT2A
C2 C3 C4 C5 C6 C7 C8: library part 08053C474JAT2A, "Capacitor", Manufacturer_Name="Kyocera AVX", Mouser Part Number=581-08053C474JAT2A, Manufacturer_Part_Number=08053C474JAT2A, Mouser Price/Stock=https://www.mouser.co.uk/ProductDetail/KYOCERA-AVX/08053C474JAT2A?qs=bb%252B1MDm7h6L8wnHciIrwGg%3D%3D
D1 D2: "Diode, SMA, 1000V, 1A, 150°C", Package="DO-214AC Diotec", Check_prices=https://www.snapeda.com/parts/M7/Diotec/view-part/?ref=eda, MF="Diotec Semiconductor", MP=M7, SnapEDA_Link=https://www.snapeda.com/parts/M7/Diotec/view-part/?ref=snap
IC1: "Integrated Circuit", Manufacturer_Name="SII Semiconductor", Datasheet Link=http://www.ic-fortune.com/upload/Download/DW01x-DS-17_EN.pdf, Height=1.45mm, Manufacturer_Part_Number=DW01A-G
IC2: "Integrated Circuit", Arrow Part Number=LM317AMDTX/NOPB, Manufacturer_Name="Texas Instruments", Mouser Part Number=926-LM317AMDTX/NOPB, Arrow Price/Stock=https://www.arrow.com/en/products/lm317amdtxnopb/texas-instruments?region=nac, Datasheet Link=http://www.ti.com/lit/gpn/lm317a, Manufacturer_Part_Number=LM317AMDTX/NOPB, Mouser Price/Stock=https://www.mouser.co.uk/ProductDetail/Texas-Instruments/LM317AMDTX-NOPB?qs=X1J7HmVL2ZE2tJdeke3r6w%3D%3D
J1: "Connector", Manufacturer_Name="NanJing Top Power", Datasheet Link=https://dlnmh9ip6v2uc.cloudfront.net/datasheets/Prototyping/TP4056.pdf, Height=1.75mm, Manufacturer_Part_Number=TP4056
J2: library part "Header Pins 1x8"
J3: library part "Switch slide button"
J5: library part "Header Pins 1x2"
J6: library part B2B-XH-A(LF)(SN), "Connector Header Through Hole 2 position 0.098 (2.50mm)", Package=None, Check_prices=https://www.snapeda.com/parts/B2B-XH-A(LF)(SN)/JST+Sales+America+Inc./view-part/?ref=eda, MF="JST Sales America Inc.", MP=B2B-XH-A(LF)(SN), SnapEDA_Link=https://www.snapeda.com/parts/B2B-XH-A(LF)(SN)/JST+Sales+America+Inc./view-part/?ref=snap
J?: "USB - micro B USB 2.0 Receptacle Connector 5 Position Surface Mount, Right Angle; Through Hole", Package=None, Availability="In Stock", Check_prices=https://www.snapeda.com/parts/ZX62D-B-5P8/Hirose/view-part/?ref=eda, MF="Hirose Connector", MP=ZX62D-B-5P8, Price=None, Purchase-URL=https://pricing.snapeda.com/search/part/ZX62D-B-5P8/?ref=eda, SnapEDA_Link=https://www.snapeda.com/parts/ZX62D-B-5P8/Hirose/view-part/?ref=snap
LED1 LED2: library part 150080GS75000, "LED", Manufacturer_Name="Wurth Elektronik", Mouser Part Number=710-150080GS75000, Datasheet Link=https://katalog.we-online.com/led/datasheet/150080GS75000.pdf, Height=0.8mm, Manufacturer_Part_Number=150080GS75000, Mouser Price/Stock=https://www.mouser.co.uk/ProductDetail/Wurth-Elektronik/150080GS75000?qs=2kOmHSv6VfQRoTEZVk1mGA%3D%3D
Q1: "Transistor", Manufacturer_Name="SII Semiconductor", Datasheet Link=http://www.ic-fortune.com/upload/Download/FS8205A-DS-12_EN.pdf, Height=1.2mm, Manufacturer_Part_Number=FS8205A
Q2 Q3: "Transistor BJT NPN", Manufacturer_Name=Nexperia, Mouser Part Number=771-BC850C-T/R, Arrow Part Number=BC850C,215, Arrow Price/Stock=https://www.arrow.com/en/products/bc850c215/nexperia?region=europe, Datasheet Link=https://assets.nexperia.com/documents/data-sheet/BC849_BC850.pdf, Height=1.1mm, Manufacturer_Part_Number=BC850C,215, Mouser Price/Stock=https://www.mouser.co.uk/ProductDetail/Nexperia/BC850C215?qs=me8TqzrmIYVR%2FGACbHj0Ow%3D%3D
R1 R3 R4 R5 R6 R7 R8 R9 R10 R11 R12: library part CPF0805B102RE1, "Resistor", Manufacturer_Name="TE Connectivity", Datasheet Link=http://docs-europe.electrocomponents.com/webdocs/13d1/0900766b813d116f.pdf, Height=0.65mm, Manufacturer_Part_Number=CPF0805B102RE1
R2: library part CPF0805B10K5E1, "Resistor", Manufacturer_Name="TE Connectivity", Mouser Part Number=279-CPF0805B10K5E1, Datasheet Link=http://docs-europe.electrocomponents.com/webdocs/13d1/0900766b813d116f.pdf, Height=0.65mm, Manufacturer_Part_Number=CPF0805B10K5E1, Mouser Price/Stock=https://www.mouser.com/Search/Refine.aspx?Keyword=279-CPF0805B10K5E1
SW1 SW2: library part "Switch button  6 x 3.5 x 2.5 mm"
U1: "MakerFocus 4pcs ESP8266 ESP-01 Serial Wireless WiFi Transceiver Receiver Module 1MB SPI Flash DC3.0-3.6V Internet of Things WiFi Module Board Compatible with Ar duino", Package=None, Availability=Unavailable, MP=ESP8266-01/ESP-01, Price=None

## Via types
v1: diameter 0.25, hole 0.25, Top Layer to Bottom Layer, 18 vias
v2: diameter 1, hole 0.25, Top Layer to Bottom Layer, 10 vias

## Nets (pads, with @x,y where several pads share a name; then routed paths per layer and width w, separated by ;. In a path a pad name is that pad's centre, name@x,y a point inside that pad or via, vN(x,y) a via of type N, cw(c..) or ccw(c..) an arc to the next point about the centre after c; other vN are vias at no path point)
+3V3: C1.1 C2.2 C5.2 C7.1 D1.C D2.A IC1.5 IC2.3 J1.4 J1.8 J5.2 LED1.2 LED2.2 R4.1 R6.2 R7.1 R8.2 R12.2 U1.8 | length 64.9
  Top Layer w0.2: v2(3.556,29.505) 4.672,29.505 5.114,29.947 5.114,30.337 6.02,31.242 J1.4@6.178,31.242 ; J1.4 7.493,31.242 ; J1.4@6.686,31.242 7.493,31.242 ; v1(8.001,30.988) 7.747,30.988 7.493,31.242 ; IC1.5@9.542,25.527 IC1.5 10.971,25.527 11.328,25.17 C2.2 ; R4.1@10.939,26.555 R4.1 v2(11.255,26.723) ; C5.2 C5.2@23.081,21.252 ; R12.2@23.081,22.959 R12.2
  Top Layer w0.25: v2(9.017,27.559) 9.017,26.052 IC1.5@9.542,25.527
  Top Layer w0.254: J1.4@6.178,31.242 J1.4
  Top Layer w0.5: C2.2@11.328,25.17 R4.1@11.328,26.65 ; C7.1 C5.2 ; C5.2@23.081,21.252 R12.2@23.081,22.959
  Top Layer w0.6: 10.541,21.463 10.541,22.987
  Top Layer w0.9: R8.2 R8.2@9.277,17.816 ; 10.541,21.463 10.541,21.117 11.811,19.847 U1.8
  Top Layer w1: J5.2 1.397,22.098 1.905,22.606 v2(1.905,22.622) ; R8.2@9.277,17.816 R6.2@10.16,17.816 ; R7.1 10.541,17.55 10.546,17.555 R6.2 ; R6.2@10.541,18.034 11.715,19.208 11.715,19.589 U1.8 ; 10.541,22.987 10.541,23.495 11.303,24.257 ; D2.A 16.941,28.448 17.206,28.183 17.206,28.133 18.57,26.769 19.79,26.769 21.159,25.4 D1.C 21.839,25.4 22.104,25.135 22.104,24.759 23.114,23.749
  Layer 1 w0.2: v1(8.001,30.988) 10.668,33.655 10.668,34.163 11.557,35.052 v1(11.811,35.052)
  Layer 2 w0.2: v2@16.231,28.296 16.338,28.403 v2(16.556,28.403)
  Layer 2 w1: v2(11.255,26.723) 12.471,27.94 13.797,27.94 14.108,27.629 15.564,27.629 v2@16.231,28.296
  Bottom Layer w0.25: IC2.3 8.346,27.559 v2(9.017,27.559)
  Bottom Layer w1: v2(1.905,22.622) 1.921,22.622 3.491,24.192 3.491,24.725 3.516,24.75 LED2.2 LED1.2 3.556,27.174 v2(3.556,29.505)
B+: C3.1 C6.1 C8.1 D2.C IC2.2 J1.5 J6.1 J?.1 R4.2 | length 31.8
  Top Layer w0.5: C3.1@14.211,28.88 C3.1 ; C6.1 15.88,32.634 15.88,30.966 v2(15.885,30.961)
  Layer 1 w1: v2(11.856,31.242) 11.929,31.242 12.21,30.961 v2(15.885,30.961) ; v2(13.054,26.74) 14.605,28.291 v2(14.605,28.829) ; v2@14.605,28.916 15.885,30.196 v2(15.885,30.961) ; v2(20.701,28.448) 18.398,28.448 v2(15.885,30.961)
  Bottom Layer w1: IC2.2 10.032,33.2 11.804,31.428 11.804,31.294 v2(11.856,31.242) ; 19.909,37.857 19.909,35.785 J6.1 22.987,30.734 v2(20.701,28.448)
B-: C1.2 C2.1 C3.2 C4.2 C5.1 C6.2 C7.2 C8.2 IC1.6 J1.1 J1.3 J3.1 J5.1 J6.2 J?.5 Q1.2 Q1.3 Q1.6 Q1.7 R3.1 R5.1 R11.2 U1.1 | length 7.7
  Top Layer w0.2: v1(4.672,29) 4.672,26.835 5.598,25.909 5.598,25.292 5.998,24.892 R5.1 ; Q1.3 Q1.2 ; Q1.6 Q1.7
  Layer 3 w0.2: v1(4.672,29) 5.041,28.631 6.079,28.631
CHRG: J1.7 R1.2 | length 1.9
  Top Layer w0.2: J1.7 13.528,33.782 R1.2
CS: IC1.2 R5.2 | length 2.5
  Top Layer w0.2: R5.2 6.623,26.392 7.077,26.392 7.942,25.527 IC1.2
D12_1: Q1.1 Q1.8 | length 5.9
  Top Layer w0.2: Q1.1 Q1.8
EN: R8.1 U1.6 | length 2.1
  Top Layer w0.2: U1.6 6.731,19.333 6.983,19.082 6.983,18.205 R8.1
G1: IC1.1 Q1.4 | length 2.9
  Top Layer w0.2: Q1.4 6.592,27.981 7.229,27.343 7.229,27.19 7.942,26.477 IC1.1
G2: IC1.3 Q1.5 | length 6.5
  Top Layer w0.2: IC1.3 8.217,24.041 8.481,23.777 v1(8.615,23.777)
  Layer 1 w0.2: v1(8.615,23.777) 8.615,25.252 v1(11.43,28.067)
GPIO0/FLS: Q3.2 R7.2 U1.3 | length 16.7
  Top Layer w0.2: v1(15.113,21.463) 17.116,21.463 17.592,21.939 Q3.2
  Layer 1 w0.2: U1.3 10.761,20.735 10.761,17.594 v1(12.333,16.021)
  Layer 2 w0.2: U1.3 10.321,21.175 14.825,21.175 v1(15.113,21.463)
GPIO1/TX: J2.4 U1.5 | length 16.8
  Bottom Layer w0.2: U1.5 7.871,16.005 9.3,16.005 10.879,14.426 10.879,13.854 11.863,12.87 16.299,12.87 J2.4
GPIO2: J2.5 U1.2 | length 12.6
  Layer 4 w0.2: J2.5@14.605,13.716 J2.5@14.649,13.76
  Bottom Layer w0.2: U1.2 7.908,21.048 7.908,19.563 10.444,17.027 11.929,17.027 14.859,14.097 J2.5
GPIO3/RX: J2.8 U1.4 | length 10.1
  Layer 2 w0.2: J2.8 7.239,15.909 v1(10.16,18.83)
  Bottom Layer w0.2: v1(10.16,18.83) 10.16,18.857 10.761,19.458 10.761,20.12 11.811,21.17 U1.4
NetC4_1: C4.1 D1.A IC2.1 R11.1 R12.1 | length 24.5
  Top Layer w0.2: v1(14.732,25.019) 14.732,24.511 R11.1 ; C4.1 15.113,22.747 R11.1 ; R12.1 20.152,22.987 17.739,25.4 D1.A 17.067,25.4 16.403,24.736 16.403,24.404 16.129,24.13 R11.1
  Bottom Layer w0.2: IC2.1 7.19,33.4 12.055,28.535 12.055,26.299 13.335,25.019 v1(14.732,25.019)
NetJ2_6: J2.6 Q2.2 R10.1 | length 11.2
  Top Layer w0.2: R10.1 9.224,15.9 10.054,15.07 11.219,15.07 J2.6 ; v1(13.716,18.288) 13.716,19.939 Q2.2 Q2.2@13.97,20.066
  Layer 1 w0.2: J2.6 13.716,15.367 v1(13.716,18.288)
NetJ2_7: J2.7 Q3.3 R9.1 | length 21.5
  Top Layer w0.2: J2.7 9.895,13.854 10.879,13.854 11.863,12.87 18.396,12.87 18.513,12.987 18.513,19.91 Q3.3 ; v1(11.746,15.144) 13.024,15.144 13.997,16.117 R9.1
  Layer 1 w0.2: J2.7 10.047,14.238 10.84,14.238 v1(11.746,15.144)
NetLED1_1: LED1.1 R2.1 | length 14.3
  Top Layer w0.2: v1(13.208,29.591) 13.462,29.591 13.716,29.845 R2.1
  Layer 1 w0.2: v1(2.413,28.575) 7.423,28.575 8.439,29.591 v1(13.208,29.591)
  Bottom Layer w0.2: LED1.1 1.691,27.853 v1(2.413,28.575)
NetLED2_1: LED2.1 R1.1 | length 22.9
  Top Layer w0.2: v1(1.651,25.908) 1.651,35.485 1.768,35.602 13.608,35.602 R1.1
  Bottom Layer w0.2: v1(1.651,25.908) 1.651,24.79 LED2.1
NetQ2_1: Q2.1 R9.2 | length 4.1
  Top Layer w0.2: Q2.1 16.129,19.934 16.129,16.574 R9.2
NetQ3_1: Q3.1 R10.2 | length 14.8
  Top Layer w0.2: R10.2 7.628,16.43 v1(8.361,16.43)
  Layer 2 w0.2: v1(8.361,16.43) 9.705,16.43 9.752,16.383 11.396,16.383 12.871,17.858 12.871,18.044 16.966,22.139 v1(19.492,22.139)
PROG: J1.2 R3.2 | length 3.3
  Top Layer w0.2: R3.2 3.781,34.793 4.792,33.782 J1.2
RST: J3.2 Q2.3 R6.1 U1.7 | length 13.6
  Top Layer w0.2: R6.1 Q2.3@14.707,17.78 ; Q2.3 14.92,18.142 15.32,18.542 v1(15.621,18.542)
  Layer 2 w0.2: U1.7 9.39,19.566 10.321,19.566 11.853,18.034 v1(12.446,18.034) ; v1(15.621,18.542) 20.066,18.542 J3.2
STDBY: J1.6 R2.2 | length 1.9
  Top Layer w0.2: J1.6 13.65,32.512 R2.2
pads on no net: IC1.4 J1.9 J2.1 J2.2 J2.3 J3. J3.3 J?.2 J?.3 J?.4 J?.S1 J?.S2 J?.S3 J?.S4 J?.S5 J?.S6 SW1.1 SW1.2 SW2.1 SW2.2

## Polygon pours and split planes (outlines as drawn)
B- on Layer 3 "B-_L02_P002" (solid, pour order 2): 26.325,12.664 26.325,31.115 26.325,39.497 15.584,39.497 15.584,35.901 0.409,35.901 0.409,12.664
B- on Layer 3 "B-_L02_P001" (solid, shelved, pour order 1): 26.035,23.495 26.035,35.941 1.016,35.941 1.016,23.495

## Text inside footprints (layer, text, board x,y; h text height)
J?: Mechanical 13 "PCB END" at 27.209,42.929 h0.61 r180